# Altium PCB PCB2.PcbDoc
Units mil, origin at the board's own origin, x right, y up, seen from the top; angles counter-clockwise.
Board outline 2955 x 2435 mil, 2 copper layers (Top Layer, Bottom Layer); 25 components, 17 nets, 81 pads, 0 vias.
Unrouted connection lines stored in the file: 27.
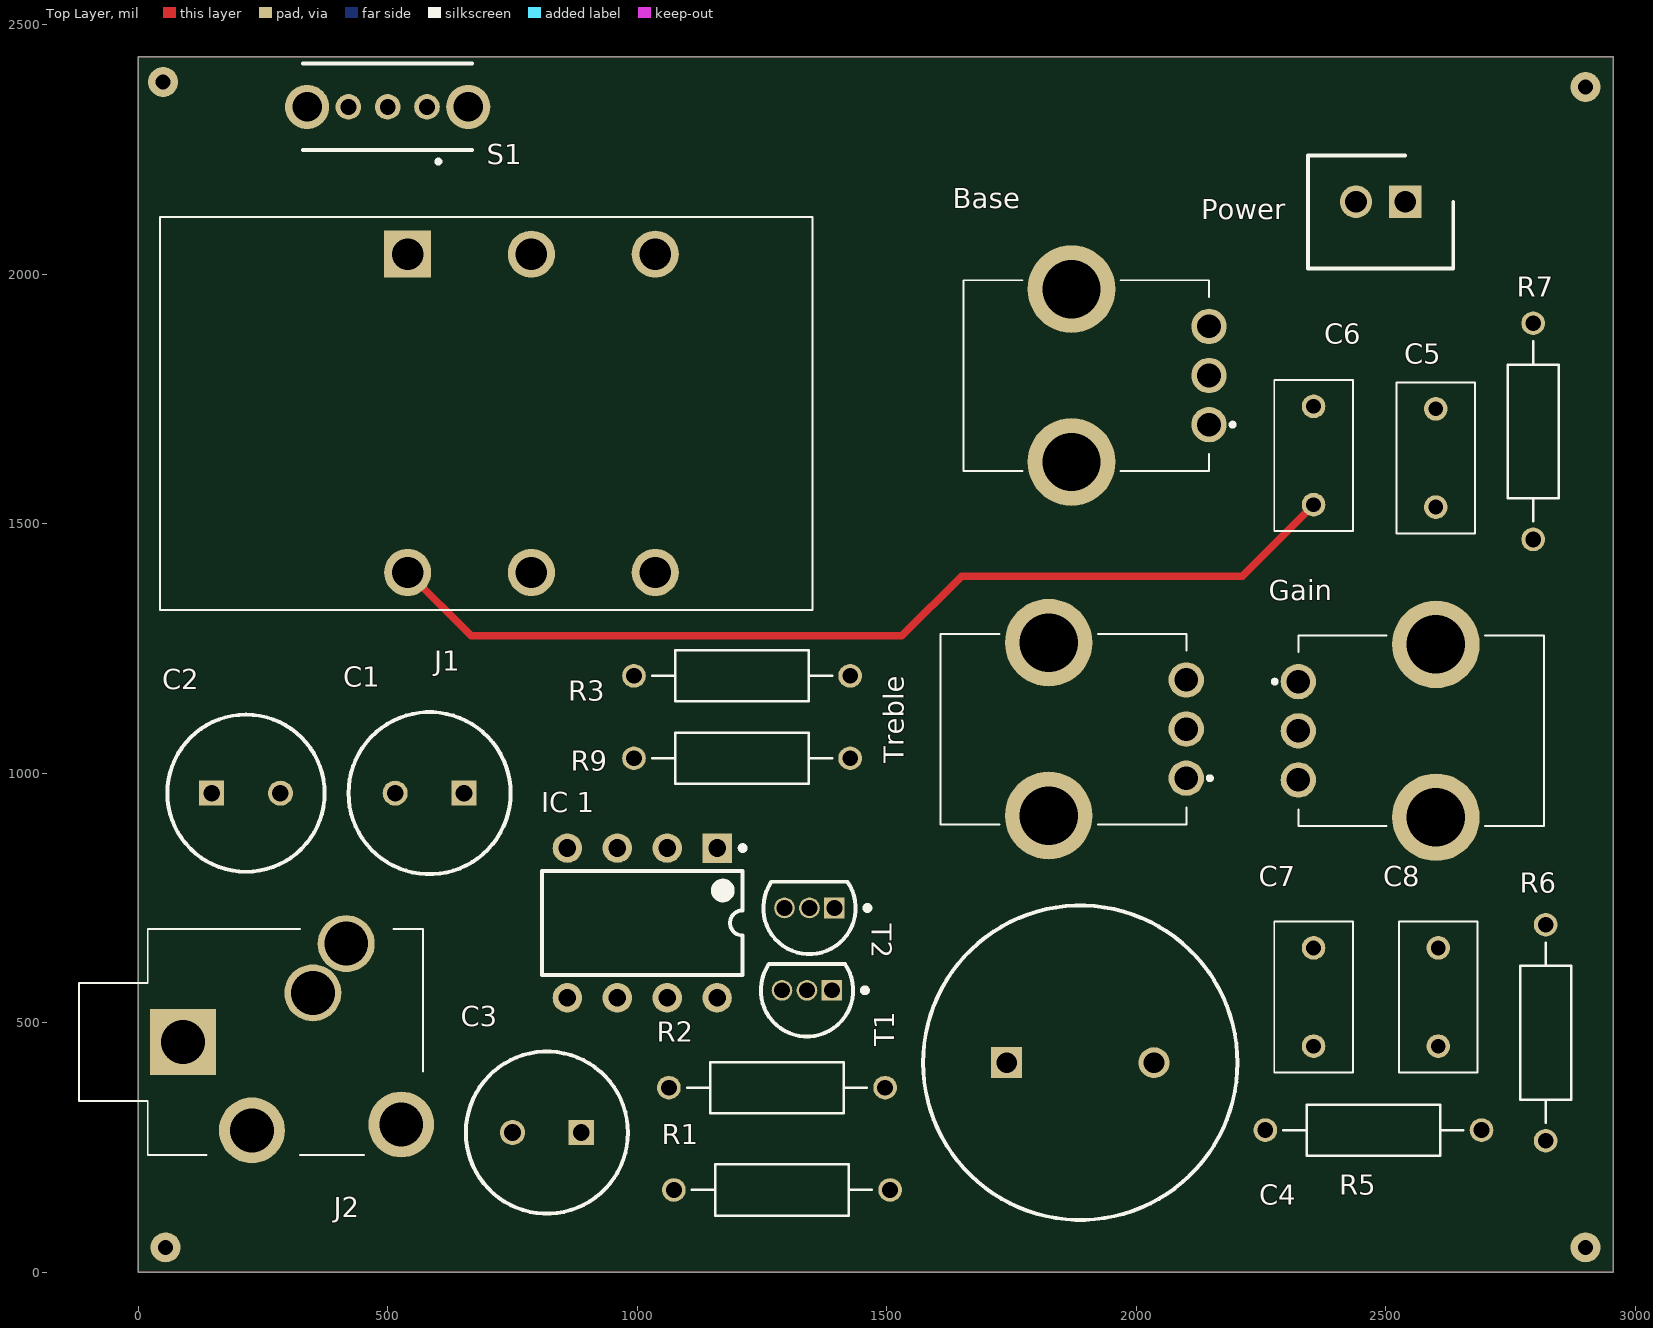
[diagram p0: Top Layer view]
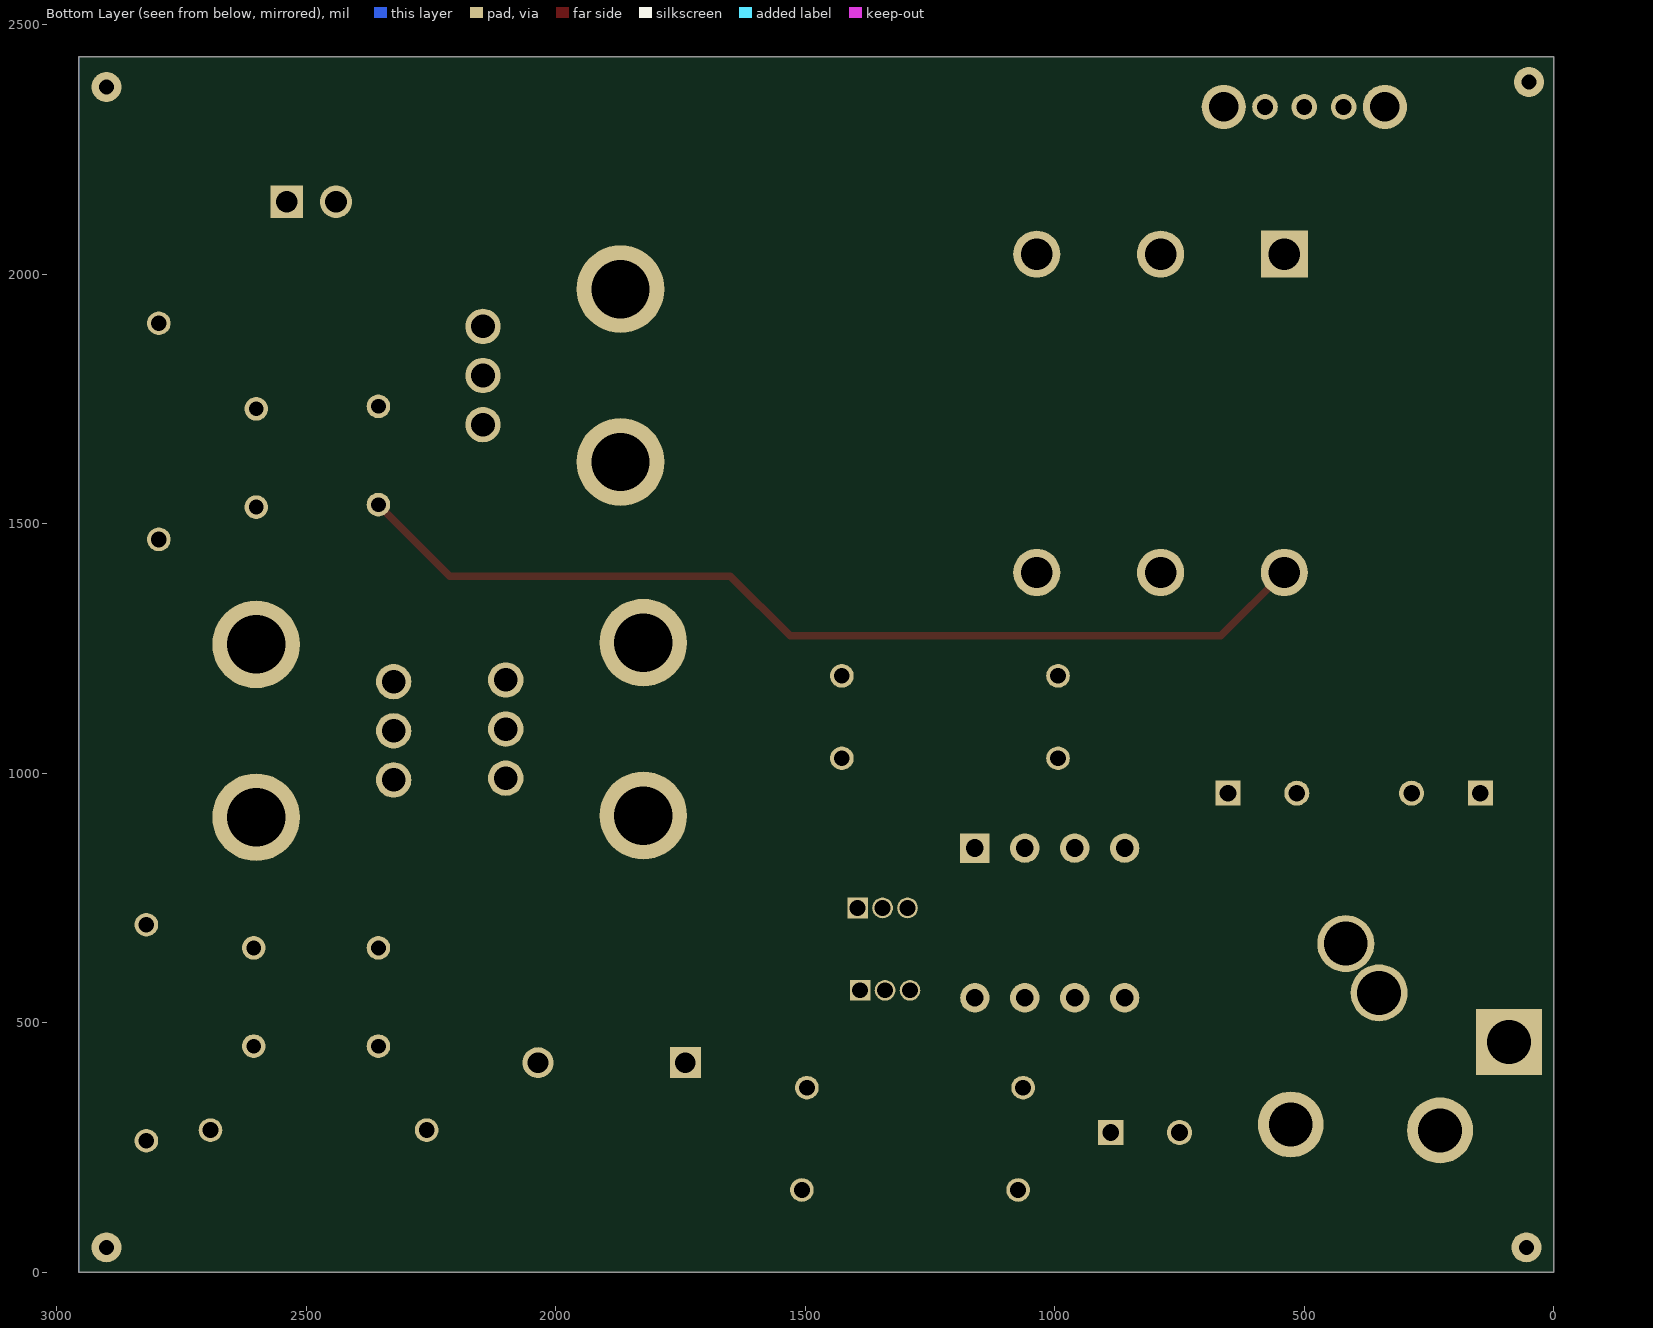
[diagram p1: Bottom Layer view, seen from below]

## Layer stack, top to bottom
Top Solder: solder mask 0.4, Solder Resist, Dk 3.5
Top Layer: signal copper 1.4
Dielectric 1: dielectric 12.6, FR-4, Dk 4.8
Bottom Layer: signal copper 1.4
Bottom Solder: solder mask 0.4, Solder Resist, Dk 3.5

## Board outline
0,0 2955,0 2955,2435 0,2435

## Design rules (kind name [scope] priority, off if disabled: settings)
BoardOutlineClearance [All] p1: gap=7.87 ignorepadtopadclearanceinfootprint=FALSE
Clearance [All] p1: gap=5 ignorepadtopadclearanceinfootprint=FALSE except(9.84: Arc-Hole Track-Hole SMDPad-Hole THPad-Hole Via-Hole Fill-Hole Poly-Hole Region-Hole Text-Hole)
ComponentClearance [All] p1: gap=5 collisioncheckmode=3 verticalgap=5 showdistances=TRUE
DiffPairsRouting [All] p1: maxlimit=10 minlimit=5 mostfreqgap=5 toplayer_minwidth=5 toplayer_maxwidth=1000 toplayer_prefwidth=5 bottomlayer_minwidth=5 bottomlayer_maxwidth=1000 bottomlayer_prefwidth=5 maxuncoupledlength=500
Height [All] p1: minheight=0 maxheight=71497.94 prefheight=500
HoleSize [All] p1: absolutevalues=TRUE maxlimit=248.03 minlimit=11.81 maxpercent=80.000 minpercent=20.000
HoleToHoleClearance [All] p1: gap=9.84 allowstackedmicrovias=FALSE
MinimumAnnularRing [All] p1: minimumring=3
MinimumSolderMaskSliver [All] p1: minsoldermaskwidth=0
PlaneClearance [All] p1: clearance=5
PlaneConnect PlaneConnectPowerPads [InPadClass('PowerPads')] p1: planeconnectstyle=Direct reliefexpansion=20 reliefentries=4 reliefconductorwidth=10 reliefairgap=10
PlaneConnect [All] p2: pad.planeconnectstyle=Relief pad.reliefexpansion=11.81 pad.reliefentries=4 pad.reliefconductorwidth=5 pad.reliefairgap=5 via.planeconnectstyle=Direct via.reliefexpansion=11.81 via.reliefentries=4 via.reliefconductorwidth=5 via.reliefairgap=5
PolygonConnect PolygonConnectPowerPads [All vs (InPadClass('PowerPads'))] p1: connectstyle=Direct reliefconductorwidth=10 reliefentries=4 polygonreliefangle="90 Angle" airgapwidth=10
PolygonConnect [All] p2: thpad.connectstyle=Relief thpad.reliefconductorwidth=5 thpad.reliefentries=4 thpad.polygonreliefangle="90 Angle" thpad.airgapwidth=5 smdpad.connectstyle=Relief smdpad.reliefconductorwidth=5 smdpad.reliefentries=4 smdpad.polygonreliefangle="90 Angle" smdpad.airgapwidth=5 via.connectstyle=Direct via.reliefconductorwidth=5 via.reliefentries=4 via.polygonreliefangle="90 Angle" via.airgapwidth=5
RoutingVias [All] p1: holewidth=11.81 width=23.62 viastyle="Through Hole" minholewidth=11.81 minwidth=23.62 maxholewidth=23.62 maxwidth=259.84
SilkToSilkClearance [All] p1: silktosilkclearance=0
SilkToSolderMaskClearance [IsPad] p1: minsilkscreentomaskgap=5 clearancetoexposedcopper=TRUE
SolderMaskExpansion [All] p1: expansion=2.95 istentingtop=FALSE
Width [All] p1: maxlimit=1000 minlimit=5 preferedwidth=5 minimp=50.000000 maximp=50.000000 favimp=50.000000
20 further rules are at their usual default settings.

## Components (designator, comment, footprint, x,y, rotation, side; value= is the part's Value field where it differs from the comment)
Base "PTV09A-4020U-B104" PTV09A4020FB103 1925.12,1796.77 r90 top
C1 "2.2uF" CAPPRD350W65D825H1250 652.8,960 r180 top
C2 "470uF" CAPPRD350W65D800H2200 147.2,960 r0 top
C3 "47uF" CAPPRD350W65D825H1250 887.8,280 r180 top
C4 "1000uF" CAPPRD750W85D1600H2200 1740,420 r0 top
C5 "22nF" RCE7U2J943JUB1H03B 2600,1730 r270 top
C6 "2.2nF" RCE7U2J943JUB1H03B 2355,1538.15 r90 top
C7 "220nF" RCE7U2J943JUB1H03B 2355,453.15 r90 top
C8 "22nF" RCE7U2J943JUB1H03B 2605,650 r270 top
Gain "PTV09A-4020U-B104" PTV09A4020FB103 2545,1085 r270 top
"IC 1" "OPA134PA" P0008A 1010,700 r270 top
J1 "4833.2330" 48332330 540,2040 r270 top
J2 "SJ1-3515N" SJ13515N 90.16,461.57 r0 top
Power "B2B-XH-A" SHDR2W64P0X250_1X2_740X575X700P 2538.43,2145 r180 top
R1 "10k" RESAD1100W55L680D260 1290,165 r180 top
R2 "10k" RESAD1100W55L680D260 1280,370 r0 top
R3 "10k" RESAD1100W55L680D260 1210,1195 r180 top
R5 "1k" RESAD1100W55L680D260 2475,285 r0 top
R6 "1k" RESAD1100W55L680D260 2820,480 r90 top
R7 "1k" RESAD1100W55L680D260 2795,1685 r90 top
R9 "560" RESAD1100W55L680D260 1210,1030 r180 top
S1 "OS102011MA1QN1" OS102011MA1QN1 500,2335 r180 top
T1 "BC547B" ONSC-TO-92-3-29-11 1340,565 r180 top
T2 "BC557BG" ONSC-TO-92-3-29-11 1345,730 r180 top
Treble "PTV09A-4020U-B104" PTV09A4020FB103 1879.53,1088.43 r90 top

## Footprints (in the part's own frame and the unit in brackets; to place one, negate y for a bottom-side part, rotate by r counter-clockwise, add the part's x,y. Pads: shape width x height; smd on the part's side, far side on the other; paste and mask are expansions set on the pad)
48332330 [mm]
  rect 2.4x2.4 hole 1.6: F1(0,0)
  round 2.4 hole 1.6: F2(0,6.3) F3(0,12.6) S1(16.2,0) S2(16.2,6.3) S3(16.2,12.6)
  silkscreen extent -1.9,-12.6 18.1,20.6, body extent -1.9,-12.6 18.1,20.6, height 15.6
CAPPRD350W65D800H2200 [mm]
  rect 1.275x1.275 hole 0.85: 1(0,0)
  round 1.275 hole 0.85: 2(3.5,0)
  silkscreen extent -2.25,-4 5.75,4, body extent -2.49,-4.25 6,4.25, height 22
CAPPRD350W65D825H1250 [mm]
  rect 1.275x1.275 hole 0.85: 1(0,0)
  round 1.275 hole 0.85: 2(3.5,0)
  silkscreen extent -2.38,-4.12 5.87,4.12, body extent -2.49,-4.25 6,4.25, height 12.5
CAPPRD750W85D1600H2200 [mm]
  rect 1.575x1.575 hole 1.05: 1(0,0)
  round 1.575 hole 1.05: 2(7.5,0)
  silkscreen extent -4.25,-8 11.75,8, body extent -4.5,-8.24 12,8.24, height 22
ONSC-TO-92-3-29-11 [mm] "TO, 3-Leads, Body Dia 4.7mm, Pitch 1.27mm"
  rect 1.05x1.05 hole 0.8: 1(-1.27,0)
  round 1.05 hole 0.8: 2(0,0) 3(1.27,0)
  silkscreen extent -3.08,-1.34 2.35,2.35, body extent -2.35,-1.33 2.36,2.36, height 7.87
OS102011MA1QN1 [mm]
  round 1.3 hole 0.8: 1(-2,0) 2(0,0) 3(2,0)
  round 2.25 hole 1.5: 4(-4.1,0) 5(4.1,0)
  silkscreen extent -4.3,-2.2 4.3,2.88, body extent -4.3,-6.22 4.3,2.18, height 4.59
P0008A [mm] "DIP, 8-Leads, Body 10.15x6.6mm, Pitch 2.54mm"
  rect 1.5x1.5 hole 0.9: 1(-3.81,3.81)
  round 1.5 hole 0.9: 2(-3.81,1.27) 3(-3.81,-1.27) 4(-3.81,-3.81) 5(3.81,-3.81) 6(3.81,-1.27) 7(3.81,1.27) 8(3.81,3.81)
  silkscreen extent -3.93,-5.1 2.65,5.24, body extent -3.95,-5.07 3.95,5.07, height 5.08
PTV09A4020FB103 [mm]
  round 1.8 hole 1.2: 1(-2.5,-5.6) 2(0,-5.6) 3(2.5,-5.6)
  round 4.46 hole 2.973: 4(-4.4,1.4) 5(4.4,1.4)
  silkscreen extent -4.85,-6.9 4.85,6.9, body extent -5.7,-5.45 5.7,7.2, height 20.06
RCE7U2J943JUB1H03B [mm]
  round 1.2 hole 0.75: 1(0,0) 2(5,0)
  silkscreen extent -1.35,-2 6.35,2, body extent -1.35,-2 6.35,2, height 15.5
RESAD1100W55L680D260 [mm]
  round 1.2 hole 0.8: 1(-5.5,0) 2(5.5,0)
  silkscreen extent -4.58,-1.3 4.58,1.3, body extent -5.77,-1.3 5.77,1.3, height 2.6
SHDR2W64P0X250_1X2_740X575X700P [mm]
  rect 1.65x1.65 hole 1.1: 1(0,0)
  round 1.65 hole 1.1: 2(2.5,0)
  silkscreen extent -2.45,-2.35 4.95,3.4, body extent -2.45,-2.88 4.95,2.88, height 7
SJ13515N [mm]
  rect 3.354x3.354 hole 2.236: 1(0,0)
  round 3.354 hole 2.236: 2(3.5,-4.5) 4(11.1,-4.2)
  round 2.9 hole 2.236: 3(8.3,5) 5(6.6,2.5)
  silkscreen extent -5.3,-5.75 12.2,5.75, body extent -5.3,-5.75 12.2,6.01, height 6.1

## Part data
Base Gain Treble: "Resistor", Manufacturer_Name=Bourns, Mouser Part Number=652-PTV09A4020U-B104, Arrow Part Number=PTV09A-4020U-B104, Arrow Price/Stock=https://www.arrow.com/en/products/ptv09a-4020u-b104/bourns?region=nac, Datasheet Link=http://uk.rs-online.com/web/p/products/7377827, Manufacturer_Part_Number=PTV09A-4020U-B104, Mouser Price/Stock=https://www.mouser.co.uk/ProductDetail/Bourns/PTV09A-4020U-B104?qs=vreUKO%252BhQaqrjXBkfM1hBQ%3D%3D
C1: library part ECA-2VM2R2BJ, "Capacitor", Manufacturer_Name=Panasonic, Mouser Part Number=667-ECA-2VM2R2BJ, Datasheet Link=https://media.digikey.com/pdf/Data%20Sheets/Panasonic%20Electronic%20Components/ECA-xxM%20Series,TypeA.pdf, Height=12.5mm, Manufacturer_Part_Number=ECA-2VM2R2BJ, Mouser Price/Stock=https://www.mouser.co.uk/ProductDetail/Panasonic/ECA-2VM2R2BJ?qs=rMMd5vBiahqKzQ1w%252BG2Zjw%3D%3D
C2: library part EEU-FR1V471LB, "Capacitor Polarised", Manufacturer_Name=Panasonic, Mouser Part Number=667-EEU-FR1V471LB, Arrow Part Number=EEU-FR1V471LB, Arrow Price/Stock=https://www.arrow.com/en/products/eeu-fr1v471lb/panasonic?region=nac, Datasheet Link=http://industrial.panasonic.com/cdbs/www-data/pdf/RDF0000/ABA0000C1259.pdf, Height=22mm, Manufacturer_Part_Number=EEU-FR1V471LB, Mouser Price/Stock=https://www.mouser.co.uk/ProductDetail/Panasonic/EEU-FR1V471LB?qs=n1SRcuzDZT29cYaqooxsEQ%3D%3D
C3: library part ECA-2AM470BJ, "Capacitor", Manufacturer_Name=Panasonic, Mouser Part Number=667-ECA-2AM470BJ, Arrow Part Number=ECA-2AM470BJ, Arrow Price/Stock=http://www.arrow.com/en/products/eca-2am470bj/panasonic, Datasheet Link=https://media.digikey.com/pdf/Data%20Sheets/Panasonic%20Electronic%20Components/ECA-xxM%20Series,TypeA.pdf, Height=12.5mm, Manufacturer_Part_Number=ECA-2AM470BJ, Mouser Price/Stock=https://www.mouser.co.uk/ProductDetail/Panasonic/ECA-2AM470BJ?qs=rMMd5vBiahqcDuBTilH5Zg%3D%3D
C4: library part EEU-FC1V102S, "Capacitor Polarised", Manufacturer_Name=Panasonic, Mouser Part Number=667-EEU-FC1V102S, Arrow Part Number=EEU-FC1V102S, Arrow Price/Stock=https://www.arrow.com/en/products/eeu-fc1v102s/panasonic?region=nac, Datasheet Link=http://industrial.panasonic.com/cdbs/www-data/pdf/RDF0000/ABA0000C1209.pdf, Height=22mm, Manufacturer_Part_Number=EEU-FC1V102S, Mouser Price/Stock=https://www.mouser.co.uk/ProductDetail/Panasonic/EEU-FC1V102S?qs=NFmy3EUjRuVoETF2mRqKyQ%3D%3D
C5 C6 C7 C8: library part RDER72J474MUE1H03A, "Capacitor", Manufacturer_Name="Murata Electronics", Mouser Part Number=81-RDER72J474MUE1H3A, Arrow Part Number=RDER72J474MUE1H03A, Arrow Price/Stock=https://www.arrow.com/en/products/rder72j474mue1h03a/murata-manufacturing?region=nac, Datasheet Link=https://psearch.en.murata.com/capacitor/product/RDER72J474MUE1H03A.html, Height=15mm, Manufacturer_Part_Number=RDER72J474MUE1H03A, Mouser Price/Stock=https://www.mouser.co.uk/ProductDetail/Murata-Electronics/RDER72J474MUE1H03A?qs=hNud%2FORuBR3jyvfy30yvdw%3D%3D
"IC 1": library part CMP-0808-00049-2, "SoundPlus(TM) High Performance Audio Operational Amplifier, 5 to 36 V, -40 to 85 degC, 8-pin DIP (P8), Green (RoHS & no Sb/Br)", Manufacturer="Texas Instruments", Code_JEDEC=MS-001, ComponentLink1Description="Manufacturer URL", ComponentLink1URL=http://www.ti.com/, ComponentLink2Description=Datasheet, ComponentLink2URL=http://www.ti.com/general/docs/lit/getliterature.tsp?genericPartNumber=OPA134&fileType=pdf, ComponentLink3Description="Package Specification", ComponentLink3URL=http://www.ti.com/litv/pdf/mpdi001b, DatasheetVersion=SBOS058, Eco-Plan="Green (RoHS & no Sb/Br)", GBW(Typ)(MHz)=8, Iq per channel(Max)(mA)=5, Mounting Technology="Through Hole", Number of Channels=1, PackageDescription="8-Pin Plastic In-Line, Body 9.59 x 6.35 mm, Pitch 2.54 mm", PackageReference=P0008A, PackageVersion="4040082/E, 04/2010", PartNumber=OPA134PA, SubFamily="Audio Operational Amplifier", Vmax(V)=36, Vmin(V)=5, Vn at Flatband(Typ)(nV/rtHz)=8
J1: "Connector", Manufacturer_Name=SCHURTER, Mouser Part Number=693-4833.233, Datasheet Link=https://4donline.ihs.com/images/VipMasterIC/IC/SHRI/SHRIS26499/SHRIS26511-1.pdf?hkey=52A5661711E402568146F3353EA87419, Height=15.5mm, Manufacturer_Part_Number=4833.2330, Mouser Price/Stock=https://www.mouser.co.uk/ProductDetail/Schurter/4833.2330?qs=wwP%252BWDYHj0Z3fNxHdwSLYg%3D%3D
J2: "Connector", Manufacturer_Name="CUI Devices", Mouser Part Number=490-SJ1-3515N, Arrow Part Number=SJ1-3515N, Arrow Price/Stock=https://www.arrow.com/en/products/sj1-3515n/cui-devices?region=nac, Datasheet Link=https://componentsearchengine.com/Datasheets/1/SJ1-3515N.pdf, Height=6mm, Manufacturer_Part_Number=SJ1-3515N, Mouser Price/Stock=https://www.mouser.co.uk/ProductDetail/CUI-Devices/SJ1-3515N?qs=WyjlAZoYn51jeVVXLxifpg%3D%3D
Power: "Connector", Manufacturer_Name="JST (JAPAN SOLDERLESS TERMINALS)", Datasheet Link=https://order.jst-mfg.com/InternetShop/app/pdf_show.php?kbn=3&key=XH%20CONNECTOR%20THROUGH-HOLE%20TYPE%20SHROUDED%20HEADER.pdf, Height=7mm, Manufacturer_Part_Number=B2B-XH-A
R1 R2 R3 R5 R6 R7 R9: library part MFR-25FBF52-1K, "1.07 kOhms Â±1% 0.25W, 1/4W Through Hole Resistor Axial - Metal Film", Package="Axial Yageo", Availability="In Stock", Check_prices=https://www.snapeda.com/parts/MFR-25FBF52-1K/Yageo/view-part/?ref=eda, MF=Yageo, MP=MFR-25FBF52-1K, Price=None, Purchase-URL=https://pricing.snapeda.com/search/part/MFR-25FBF52-1K/?ref=eda, SnapEDA_Link=https://www.snapeda.com/parts/MFR-25FBF52-1K/Yageo/view-part/?ref=snap
S1: "Switch", Manufacturer_Name="C & K COMPONENTS", Mouser Part Number=611-OS102011MA1QN1, Arrow Part Number=OS102011MA1QN1, Arrow Price/Stock=https://www.arrow.com/en/products/os102011ma1qn1/ck?region=europe, Datasheet Link=https://www.ckswitches.com/media/1428/os.pdf, Manufacturer_Part_Number=OS102011MA1QN1, Mouser Price/Stock=https://www.mouser.co.uk/ProductDetail/CK/OS102011MA1QN1?qs=WtljUlYws5R6MUgHcLkz4w%3D%3D
T1: library part CMP-1048-01467-1, "Amplifier Transistor, NPN Silicon, 3-Pin TO-92, Bulk Box", Manufacturer="On Semiconductor", ComponentLink1Description="Manufacturer URL", ComponentLink1URL=http://www.onsemi.com/, ComponentLink2Description=Datasheet, ComponentLink2URL=http://www.onsemi.com/pub_link/Collateral/BC546-D.PDF, ComponentLink3Description="Package Specification", ComponentLink3URL=http://www.onsemi.cn/pub_link/Collateral/2N6426-D.PDF, DatasheetVersion="Rev. 7", fT Min (MHz)=150, IC Continuous (A)=0.1, Mounting Technology="Through Hole", PackageDescription="3-Pin Transistor Outline, Body 4.825 x 3.685 mm, Pitch 1.27 mm", PackageReference=TO-92-3-29-11_AM_SL, PackageVersion="Rev. AM", Packing="Bulk Box", PartNumber=BC547B, Polarity=NPN, RoHS=FALSE
T2: library part CMP-1048-01440-1, "Amplifier Transistor, PNP Silicon, 3-Pin TO-92, Pb-Free, Bulk Box", Manufacturer="On Semiconductor", ComponentLink1Description="Manufacturer URL", ComponentLink1URL=http://www.onsemi.com/, ComponentLink2Description=Datasheet, ComponentLink2URL=http://www.onsemi.com/pub_link/Collateral/BC556B-D.PDF, ComponentLink3Description="Package Specification", ComponentLink3URL=http://www.onsemi.cn/pub_link/Collateral/2N6426-D.PDF, DatasheetVersion="Rev. 3", IC Continuous (A)=-0.1, Mounting Technology="Through Hole", PackageDescription="3-Pin Transistor Outline, Body 4.825 x 3.685 mm, Pitch 1.27 mm", PackageReference=TO-92-3-29-11_AM_SL, PackageVersion="Rev. AM", Packing="Bulk Box", PartNumber=BC557BG, Polarity=PNP, RoHS=TRUE

## Free pads (board coordinates)
  round 60 hole 30: 1(2900,2375) 2(2900,50) 3(50,2385) 4(55,50)

## Nets (pads, with @x,y where several pads share a name; then routed paths per layer and width w, separated by ;. In a path a pad name is that pad's centre, name@x,y a point inside that pad or via, vN(x,y) a via of type N, cw(c..) or ccw(c..) an arc to the next point about the centre after c; other vN are vias at no path point)
GND: "IC 1.4" C2.2 C3.1 C5.2 J1.S3 J2.1 pad.1 pad.2 pad.3 pad.4 Power.2 R2.1 R5.1 T2.1
IN: C6.1 J1.S1 R6.2 | length 1976.7
  Top Layer w15: J1.S1 667.2,1275 1530,1275 1650,1395 2211.85,1395 C6.1
NetC1_2: C1.2 R3.2
NetC3_2: "IC 1.3" C3.2 R1.1 R2.2
"NetIC 1_6": "IC 1.6" R9.2 T1.2 T2.2
OUT: C4.2 J2.2
S1: Power.1 S1.1
To-1k: Base.2 C7.1 C8.2 R7.2
V1_1: Gain.1 R3.1
V1_2: "IC 1.2" Gain.2
V1_3: C4.1 Gain.3 R9.1 T1.3 T2.3
V2_1: C6.2 Treble.1
V2_2: C1.1 R7.1 Treble.2
V2_3: C5.1 Treble.3
V3_1: Base.1 C8.1 R6.1
V3_3: Base.3 C7.2 R5.2
VCC: "IC 1.7" C2.1 R1.2 S1.2 T1.1
pads on no net: "IC 1.1" "IC 1.5" "IC 1.8" Base.4 Base.5 Gain.4 Gain.5 J1.F1 J1.F2 J1.F3 J1.S2 J2.3 J2.4 J2.5 S1.3 S1.4 S1.5 Treble.4 Treble.5

## Polygon pours and split planes (outlines as drawn)
GND on Bottom Layer "NONET_L02_P000" (solid, shelved, pour order 0): 0,2435 2955,2435 2955,0 0,0
VCC on Top Layer "NONET_L01_P002" (solid, shelved, pour order 2): 0,2435 2955,2435 2955,0 0,0